# EAGLE board LEDproto (EAGLE 6.6.0), part 1 of 2
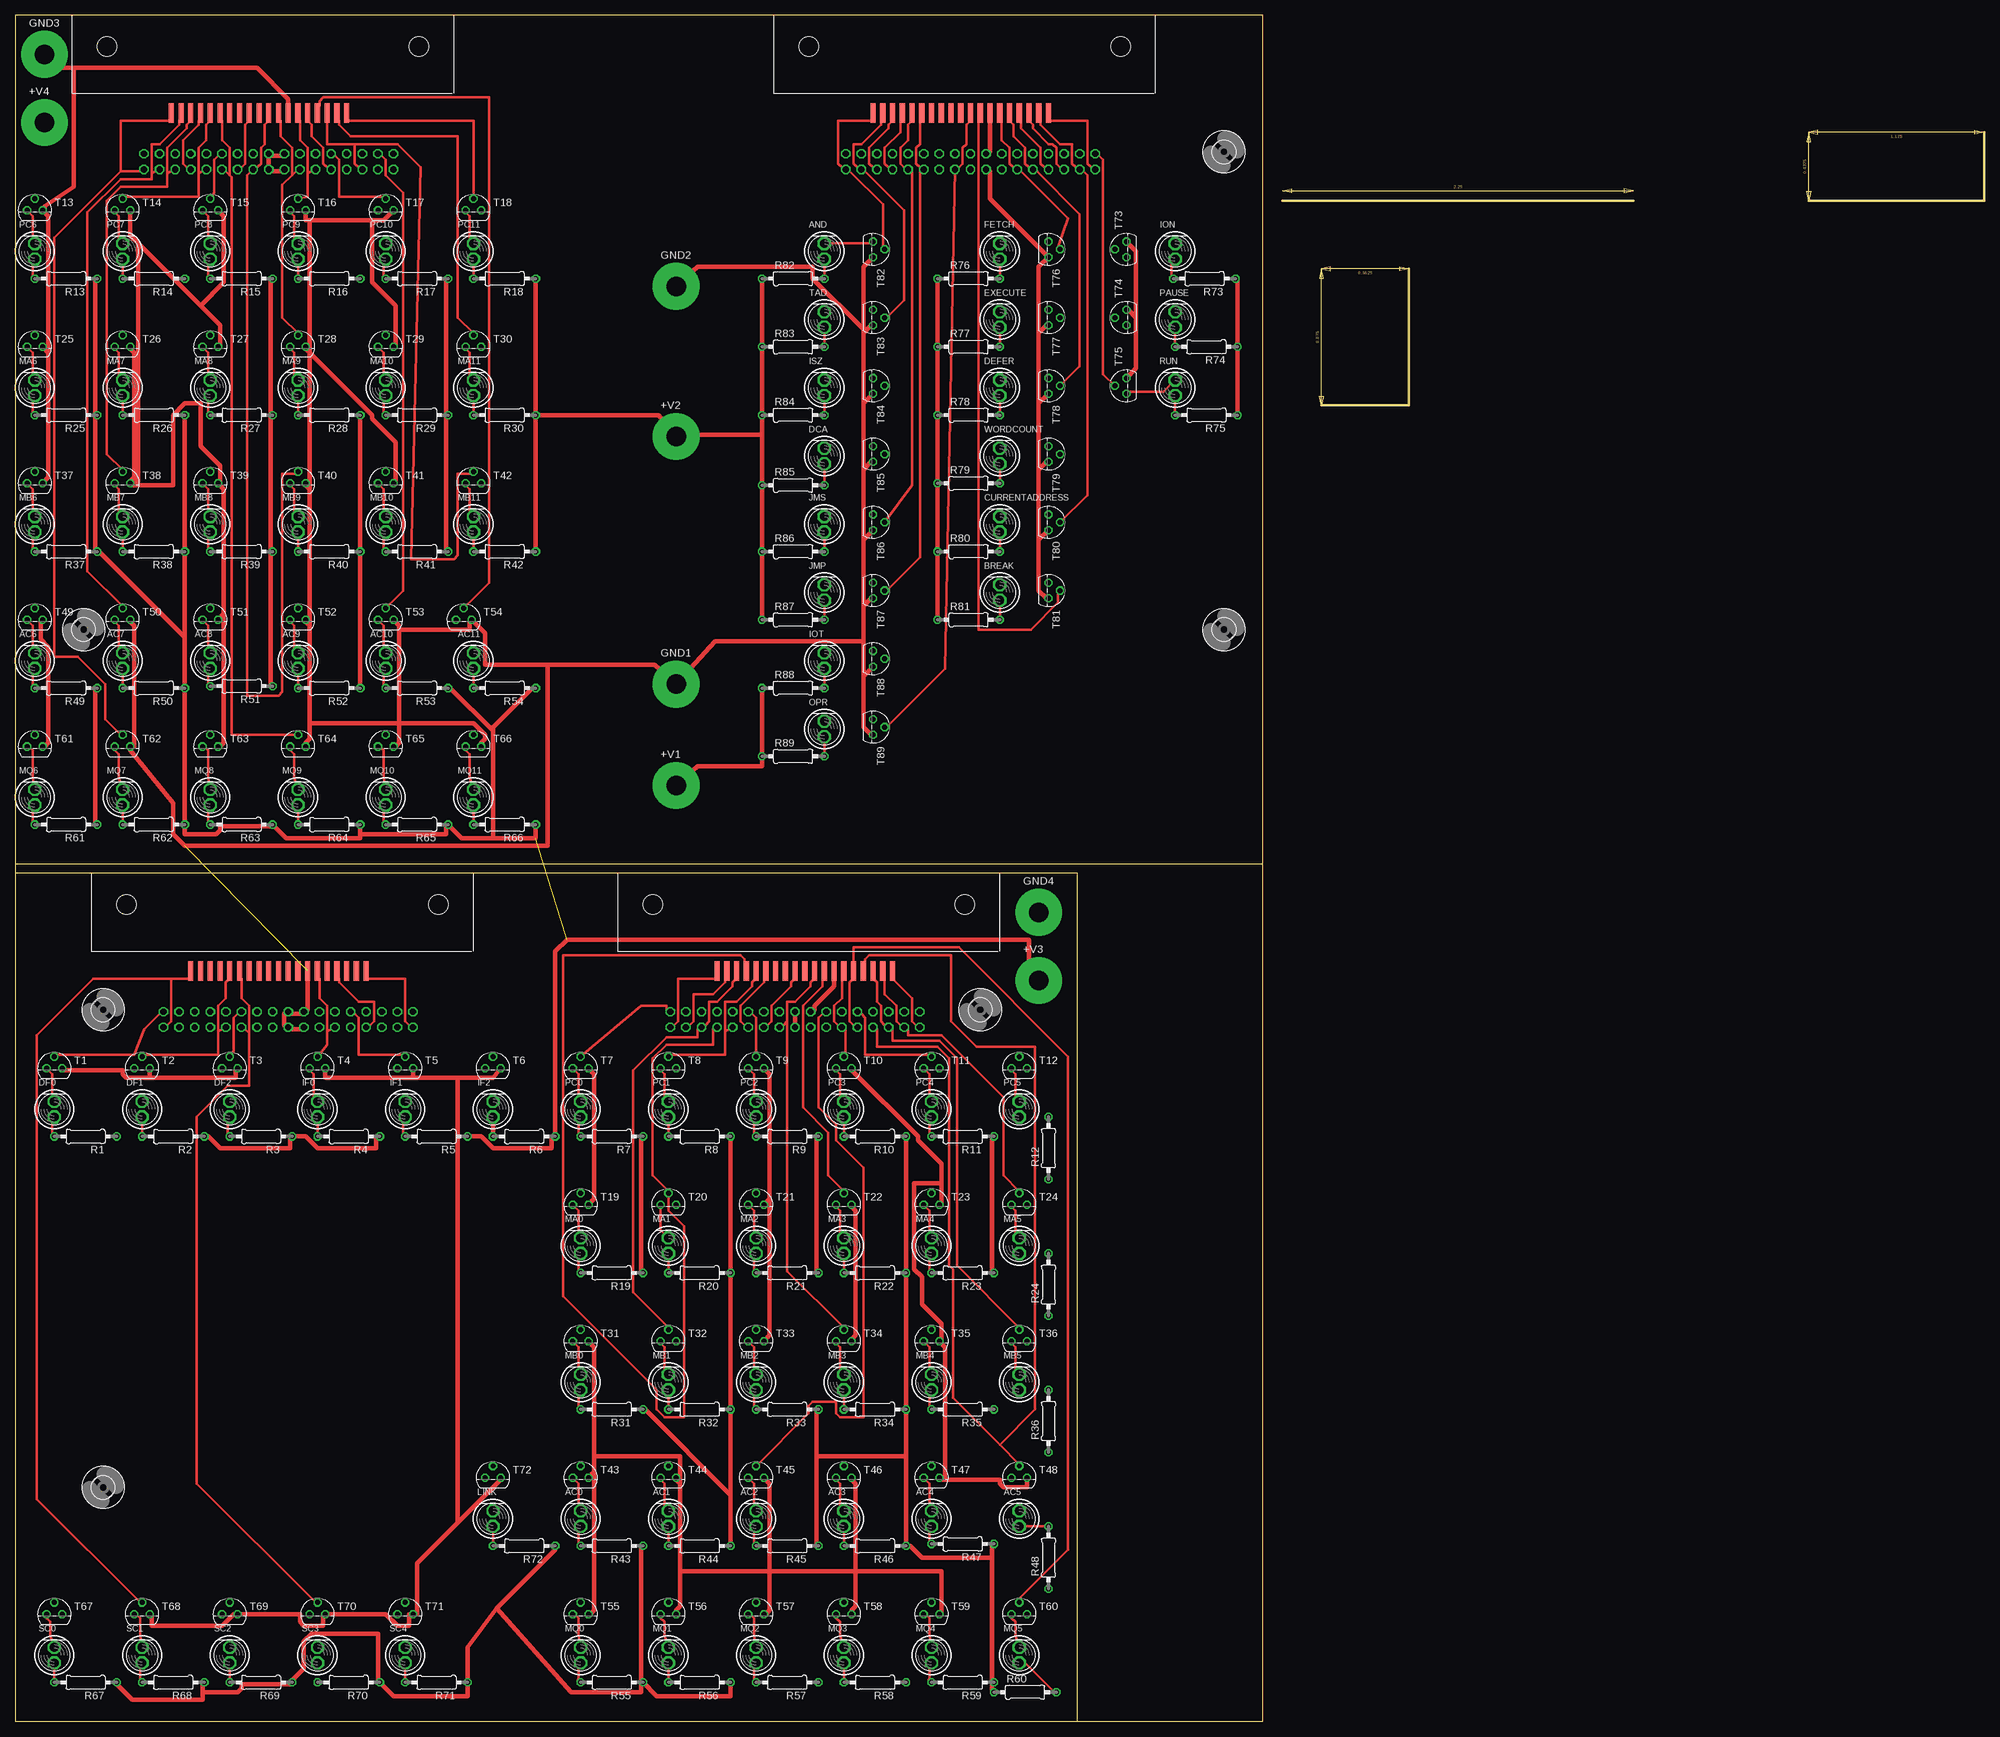
[diagram p0: board, top side]
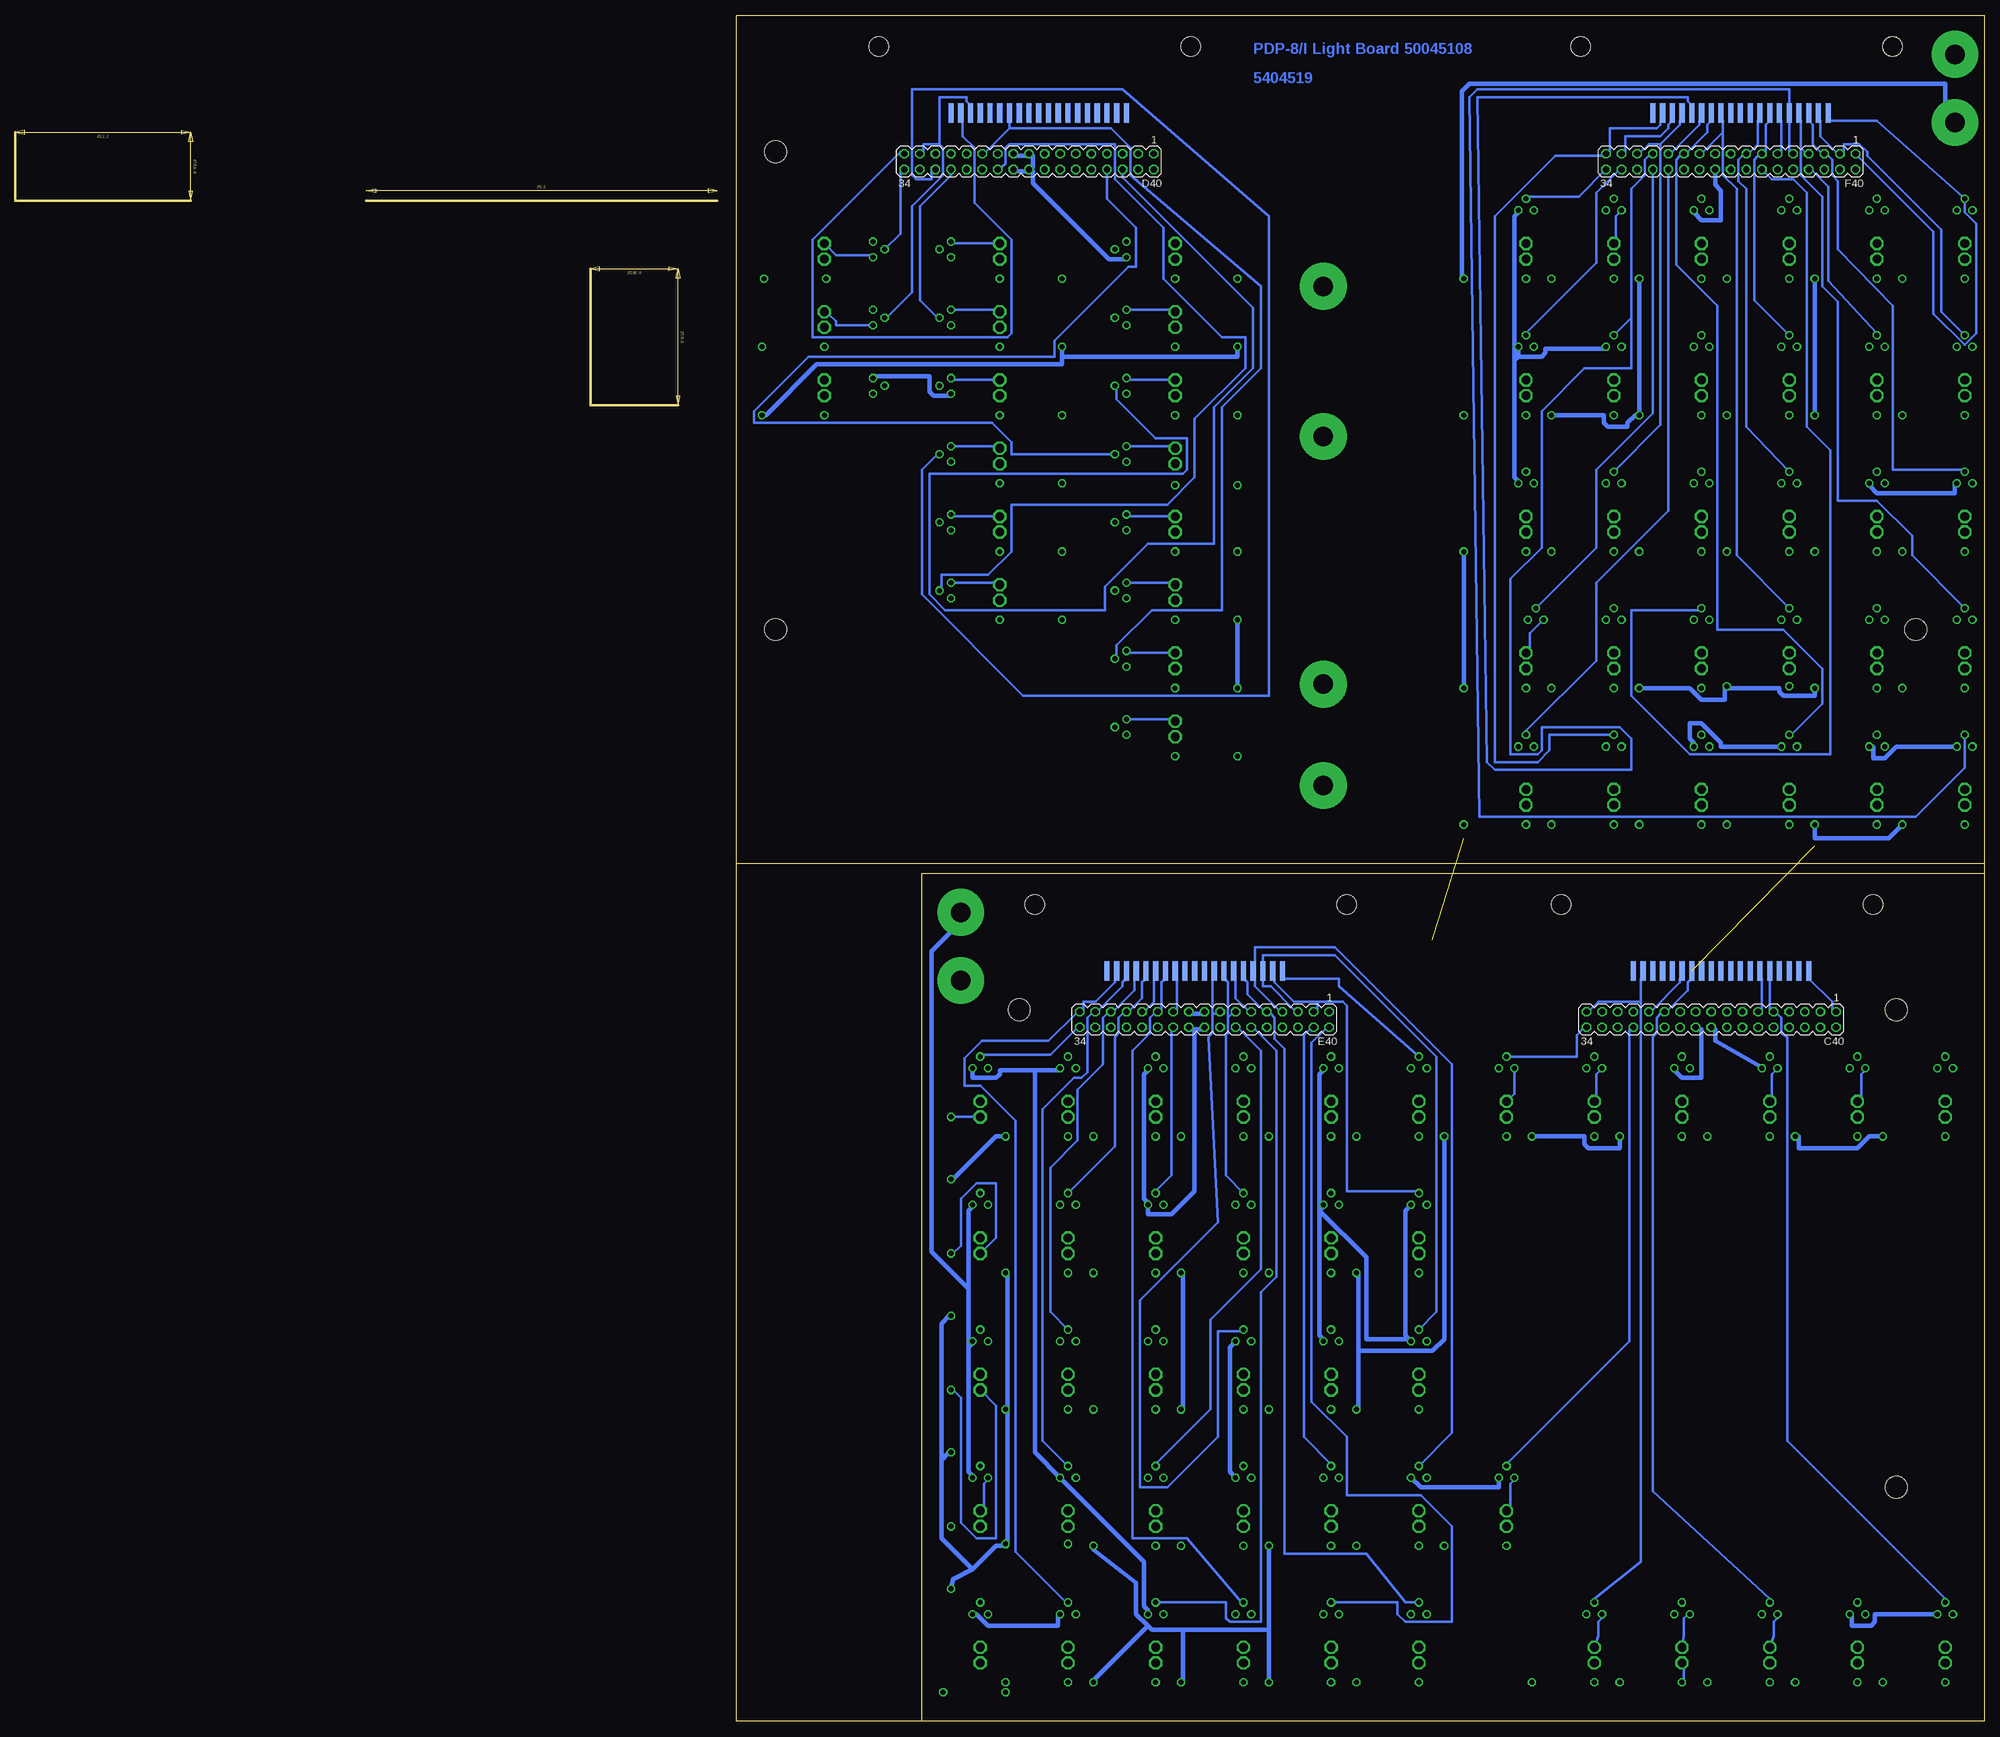
[diagram p1: board, bottom side, seen from below]

Size 320.68 x 277.81 mm. Coordinates in mm from the lower left corner, seen from the top.
Outline: 203.2,139.7 203.2,277.81 0,277.81 0,139.7
Outline: 0,138.11 173.04,138.11 173.04,0
Outline: 0,138.11 0,0 173.04,0
Outline: 0,139.7 203.2,139.7
Outline: 173.04,0 203.2,0 203.2,139.7
Outline: 0,139.7 0,138.11
Outline: 292.1,247.65 320.68,247.65 320.68,258.76
Outline: 206.38,247.65 263.52,247.65
Outline: 212.72,214.31 227.01,214.31 227.01,236.54
Copper layers (1*16): Top 0.035mm / dielectric 1.5mm / Bottom 0.035mm
Design rules "15mils": minimum track width 15mil, minimum drill 24mil, track to track 15mil, track to pad 10mil, pad to pad 10mil, via to via 10mil, smd to smd 10mil, copper to edge 25mil, drill to drill 10mil, minimum pad ring 10mil, minimum via ring 8mil, stop-mask expansion 0mil, vias tented up to drill 0mil, thermal gap 10mil
Net classes: 1 supply: width 0.762 mm

## Footprints (pad centres in the part's own frame; a part is rotated, then mirrored left to right if it is on the bottom)
SPADELUG = drill 3.175 pad 7.62: 1 0,0
BULB = drill 1.422 octagon: A 0,0; B 0,2.54
MA17-2 = drill 1.016 octagon: 1 -20.32,-1.27; 2 -20.32,1.27; 3 -17.78,-1.27; 4 -17.78,1.27; 5 -15.24,-1.27; 6 -15.24,1.27; 7 -12.7,-1.27; 8 -12.7,1.27; 9 -10.16,-1.27; 10 -10.16,1.27; 11 -7.62,-1.27; 12 -7.62,1.27; 13 -5.08,-1.27; 14 -5.08,1.27; 15 -2.54,-1.27; 16 -2.54,1.27; 17 0,-1.27; 18 0,1.27; 19 2.54,-1.27; 20 2.54,1.27; 21 5.08,-1.27; 22 5.08,1.27; 23 7.62,-1.27; 24 7.62,1.27; 25 10.16,-1.27; 26 10.16,1.27; 27 12.7,-1.27; 28 12.7,1.27; 29 15.24,-1.27; 30 15.24,1.27; 31 17.78,-1.27; 32 17.78,1.27; 33 20.32,-1.27; 34 20.32,1.27
FLEX19 = smd 3.175 x 0.838: 1 0,14.287; 2 0,12.7; 3 0,11.113; 4 0,9.525; 5 0,7.938; 6 0,6.35; 7 0,4.763; 8 0,3.175; 9 0,1.587; 10 0,0; 11 0,-1.587; 12 0,-3.175; 13 0,-4.763; 14 0,-6.35; 15 0,-7.938; 16 0,-9.525; 17 0,-11.113; 18 0,-12.7; 19 0,-14.287
0207/10 = drill 0.813 octagon: 1 -5.08,0; 2 5.08,0
TO92 = drill 0.813 octagon: 1 1.27,0; 2 0,1.905; 3 -1.27,0
STRAIN-RELIEF = hole 3.175: 7.62,56.515; 7.62,5.715
3,6 = hole 3.6: 0,0

## Placement (x,y rotation side)
+V1  LUG  [SPADELUG]  107.63,152.4 0 top
+V2  LUG  [SPADELUG]  107.63,209.23 0 top
+V3  LUG  [SPADELUG]  166.69,120.65 0 top
+V4  LUG  [SPADELUG]  4.76,260.35 0 top
AC0  [BULB]  92.08,31.75 0 top
AC1  [BULB]  106.36,31.75 0 top
AC2  [BULB]  120.65,31.75 0 top
AC3  [BULB]  134.94,31.75 0 top
AC4  [BULB]  149.22,31.75 0 top
AC5  [BULB]  163.51,31.75 0 top
AC6  [BULB]  3.17,171.45 0 top
AC7  [BULB]  17.46,171.45 0 top
AC8  [BULB]  31.75,171.45 0 top
AC9  [BULB]  46.04,171.45 0 top
AC10  [BULB]  60.33,171.45 0 top
AC11  [BULB]  74.61,171.45 0 top
AND  [BULB]  131.76,238.12 0 top
BREAK  [BULB]  160.34,182.56 0 top
C40  [MA17-2]  44.45,114.3 180 bottom
C40BOT  FLEX19  [FLEX19]  42.86,122.24 90 top
C40TOP  FLEX19  [FLEX19]  42.86,122.24 270 bottom
CURRENTADDRESS  [BULB]  160.34,193.68 0 top
D40  [MA17-2]  155.57,254 180 bottom
D40BOT  FLEX19  [FLEX19]  128.59,122.24 90 top
D40TOP  FLEX19  [FLEX19]  128.59,122.24 270 bottom
DCA  [BULB]  131.76,204.79 0 top
DEFER  [BULB]  160.34,215.9 0 top
DF0  [BULB]  6.35,98.42 0 top
DF1  [BULB]  20.64,98.42 0 top
DF2  [BULB]  34.92,98.42 0 top
E40  [MA17-2]  127,114.3 180 bottom
E40BOT  FLEX19  [FLEX19]  39.69,261.94 90 top
E40TOP  FLEX19  [FLEX19]  39.69,261.94 270 bottom
EXECUTE  [BULB]  160.34,227.01 0 top
F40  [MA17-2]  41.27,254 180 bottom
F40BOT  FLEX19  [FLEX19]  153.99,261.94 90 top
F40TOP  FLEX19  [FLEX19]  153.99,261.94 270 bottom
FETCH  [BULB]  160.34,238.12 0 top
GND1  LUG  [SPADELUG]  107.63,168.91 0 top
GND2  LUG  [SPADELUG]  107.63,233.68 0 top
GND3  LUG  [SPADELUG]  4.76,271.46 0 top
GND4  LUG  [SPADELUG]  166.69,131.76 0 top
IF0  [BULB]  49.21,98.42 0 top
IF1  [BULB]  63.5,98.42 0 top
IF2  [BULB]  77.79,98.42 0 top
ION  [BULB]  188.91,238.12 0 top
IOT  [BULB]  131.76,171.45 0 top
ISZ  [BULB]  131.76,215.9 0 top
JMP  [BULB]  131.76,182.56 0 top
JMS  [BULB]  131.76,193.68 0 top
LINK  [BULB]  77.79,31.75 0 top
MA0  [BULB]  92.08,76.2 0 top
MA1  [BULB]  106.36,76.2 0 top
MA2  [BULB]  120.65,76.2 0 top
MA3  [BULB]  134.94,76.2 0 top
MA4  [BULB]  149.22,76.2 0 top
MA5  [BULB]  163.51,76.2 0 top
MA6  [BULB]  3.17,215.9 0 top
MA7  [BULB]  17.46,215.9 0 top
MA8  [BULB]  31.75,215.9 0 top
MA9  [BULB]  46.04,215.9 0 top
MA10  [BULB]  60.33,215.9 0 top
MA11  [BULB]  74.61,215.9 0 top
MB0  [BULB]  92.08,53.98 0 top
MB1  [BULB]  106.36,53.98 0 top
MB2  [BULB]  120.65,53.98 0 top
MB3  [BULB]  134.94,53.98 0 top
MB4  [BULB]  149.22,53.98 0 top
MB5  [BULB]  163.51,53.98 0 top
MB6  [BULB]  3.17,193.68 0 top
MB7  [BULB]  17.46,193.68 0 top
MB8  [BULB]  31.75,193.68 0 top
MB9  [BULB]  46.04,193.68 0 top
MB10  [BULB]  60.33,193.68 0 top
MB11  [BULB]  74.61,193.68 0 top
MQ0  [BULB]  92.08,9.53 0 top
MQ1  [BULB]  106.36,9.53 0 top
MQ2  [BULB]  120.65,9.53 0 top
MQ3  [BULB]  134.94,9.53 0 top
MQ4  [BULB]  149.22,9.53 0 top
MQ5  [BULB]  163.51,9.53 0 top
MQ6  [BULB]  3.17,149.22 0 top
MQ7  [BULB]  17.46,149.22 0 top
MQ8  [BULB]  31.75,149.22 0 top
MQ9  [BULB]  46.04,149.22 0 top
MQ10  [BULB]  60.33,149.22 0 top
MQ11  [BULB]  74.61,149.22 0 top
OPR  [BULB]  131.76,160.34 0 top
PAUSE  [BULB]  188.91,227.01 0 top
PC0  [BULB]  92.08,98.42 0 top
PC1  [BULB]  106.36,98.42 0 top
PC2  [BULB]  120.65,98.42 0 top
PC3  [BULB]  134.94,98.42 0 top
PC4  [BULB]  149.22,98.42 0 top
PC5  [BULB]  163.51,98.42 0 top
PC6  [BULB]  3.17,238.12 0 top
PC7  [BULB]  17.46,238.12 0 top
PC8  [BULB]  31.75,238.12 0 top
PC9  [BULB]  46.04,238.12 0 top
PC10  [BULB]  60.33,238.12 0 top
PC11  [BULB]  74.61,238.12 0 top
R1  1.5K  [0207/10]  11.43,95.25 180 top
R2  1.5K  [0207/10]  25.72,95.25 180 top
R3  1.5K  [0207/10]  40.01,95.25 180 top
R4  1.5K  [0207/10]  54.29,95.25 180 top
R5  1.5K  [0207/10]  68.58,95.25 180 top
R6  1.5K  [0207/10]  82.87,95.25 180 top
R7  1.5K  [0207/10]  97.16,95.25 180 top
R8  1.5K  [0207/10]  111.44,95.25 180 top
R9  1.5K  [0207/10]  125.73,95.25 180 top
R10  1.5K  [0207/10]  140.02,95.25 180 top
R11  1.5K  [0207/10]  154.31,95.25 180 top
R12  1.5K  [0207/10]  168.28,93.34 90 top
R13  1.5K  [0207/10]  8.26,234.95 180 top
R14  1.5K  [0207/10]  22.54,234.95 180 top
R15  1.5K  [0207/10]  36.83,234.95 180 top
R16  1.5K  [0207/10]  51.12,234.95 180 top
R17  1.5K  [0207/10]  65.41,234.95 180 top
R18  1.5K  [0207/10]  79.69,234.95 180 top
R19  1.5K  [0207/10]  97.16,73.03 180 top
R20  1.5K  [0207/10]  111.44,73.03 180 top
R21  1.5K  [0207/10]  125.73,73.03 180 top
R22  1.5K  [0207/10]  140.02,73.03 180 top
R23  1.5K  [0207/10]  154.31,73.03 180 top
R24  1.5K  [0207/10]  168.28,71.12 90 top
R25  1.5K  [0207/10]  8.26,212.72 180 top
R26  1.5K  [0207/10]  22.54,212.72 180 top
R27  1.5K  [0207/10]  36.83,212.72 180 top
R28  1.5K  [0207/10]  51.12,212.72 180 top
R29  1.5K  [0207/10]  65.41,212.72 180 top
R30  1.5K  [0207/10]  79.69,212.72 180 top
R31  1.5K  [0207/10]  97.16,50.8 180 top
R32  1.5K  [0207/10]  111.44,50.8 180 top
R33  1.5K  [0207/10]  125.73,50.8 180 top
R34  1.5K  [0207/10]  140.02,50.8 180 top
R35  1.5K  [0207/10]  154.31,50.8 180 top
R36  1.5K  [0207/10]  168.28,48.9 90 top
R37  1.5K  [0207/10]  8.26,190.5 180 top
R38  1.5K  [0207/10]  22.54,190.5 180 top
R39  1.5K  [0207/10]  36.83,190.5 180 top
R40  1.5K  [0207/10]  51.12,190.5 180 top
R41  1.5K  [0207/10]  65.41,190.5 180 top
R42  1.5K  [0207/10]  79.69,190.5 180 top
R43  1.5K  [0207/10]  97.16,28.57 180 top
R44  1.5K  [0207/10]  111.44,28.57 180 top
R45  1.5K  [0207/10]  125.73,28.57 180 top
R46  1.5K  [0207/10]  140.02,28.57 180 top
R47  1.5K  [0207/10]  154.31,28.89 180 top
R48  1.5K  [0207/10]  168.28,26.67 90 top
R49  1.5K  [0207/10]  8.26,168.28 180 top
R50  1.5K  [0207/10]  22.54,168.28 180 top
R51  1.5K  [0207/10]  36.83,168.59 180 top
R52  1.5K  [0207/10]  51.12,168.28 180 top
R53  1.5K  [0207/10]  65.41,168.28 180 top
R54  1.5K  [0207/10]  79.69,168.28 180 top
R55  1.5K  [0207/10]  97.16,6.35 180 top
R56  1.5K  [0207/10]  111.44,6.35 180 top
R57  1.5K  [0207/10]  125.73,6.35 180 top
R58  1.5K  [0207/10]  140.02,6.35 180 top
R59  1.5K  [0207/10]  154.31,6.35 180 top
R60  1.5K  [0207/10]  164.47,4.76 0 top
R61  1.5K  [0207/10]  8.26,146.05 180 top
R62  1.5K  [0207/10]  22.54,146.05 180 top
R63  1.5K  [0207/10]  36.83,146.05 180 top
R64  1.5K  [0207/10]  51.12,146.05 180 top
R65  1.5K  [0207/10]  65.41,146.05 180 top
R66  1.5K  [0207/10]  79.69,146.05 180 top
R67  1.5K  [0207/10]  11.43,6.35 180 top
R68  1.5K  [0207/10]  25.72,6.35 180 top
R69  1.5K  [0207/10]  40.01,6.35 180 top
R70  1.5K  [0207/10]  54.29,6.35 180 top
R71  1.5K  [0207/10]  68.58,6.35 180 top
R72  1.5K  [0207/10]  82.87,28.57 180 top
R73  1.5K  [0207/10]  193.68,234.95 180 top
R74  1.5K  [0207/10]  193.99,223.84 180 top
R75  1.5K  [0207/10]  193.99,212.72 180 top
R76  1.5K  [0207/10]  155.26,234.95 0 top
R77  1.5K  [0207/10]  155.26,223.84 0 top
R78  1.5K  [0207/10]  155.26,212.72 0 top
R79  1.5K  [0207/10]  155.26,201.61 0 top
R80  1.5K  [0207/10]  155.26,190.5 0 top
R81  1.5K  [0207/10]  155.26,179.39 0 top
R82  1.5K  [0207/10]  126.68,234.95 0 top
R83  1.5K  [0207/10]  126.68,223.84 0 top
R84  1.5K  [0207/10]  126.68,212.72 0 top
R85  1.5K  [0207/10]  126.68,201.29 0 top
R86  1.5K  [0207/10]  126.68,190.5 0 top
R87  1.5K  [0207/10]  126.68,179.39 0 top
R88  1.5K  [0207/10]  126.68,168.28 0 top
R89  1.5K  [0207/10]  126.68,157.16 0 top
RUN  [BULB]  188.91,215.9 0 top
SC0  [BULB]  6.35,9.53 0 top
SC1  [BULB]  20.64,9.53 0 top
SC2  [BULB]  34.92,9.53 0 top
SC3  [BULB]  49.21,9.53 0 top
SC4  [BULB]  63.5,9.53 0 top
T1  2N2222  [TO92]  6.35,106.36 0 top
T2  2N2222  [TO92]  20.64,106.36 0 top
T3  2N2222  [TO92]  34.92,106.36 0 top
T4  2N2222  [TO92]  49.21,106.36 0 top
T5  2N2222  [TO92]  63.5,106.36 0 top
T6  2N2222  [TO92]  77.79,106.36 0 top
T7  2N2222  [TO92]  92.08,106.36 0 top
T8  2N2222  [TO92]  106.36,106.36 0 top
T9  2N2222  [TO92]  120.65,106.36 0 top
T10  2N2222  [TO92]  134.94,106.36 0 top
T11  2N2222  [TO92]  149.22,106.36 0 top
T12  2N2222  [TO92]  163.51,106.36 0 top
T13  2N2222  [TO92]  3.17,246.06 0 top
T14  2N2222  [TO92]  17.46,246.06 0 top
T15  2N2222  [TO92]  31.75,246.06 0 top
T16  2N2222  [TO92]  46.04,246.06 0 top
T17  2N2222  [TO92]  60.33,246.06 0 top
T18  2N2222  [TO92]  74.61,246.06 0 top
T19  2N2222  [TO92]  92.08,84.14 0 top
T20  2N2222  [TO92]  106.36,84.14 0 top
T21  2N2222  [TO92]  120.65,84.14 0 top
T22  2N2222  [TO92]  134.94,84.14 0 top
T23  2N2222  [TO92]  149.22,84.14 0 top
T24  2N2222  [TO92]  163.51,84.14 0 top
T25  2N2222  [TO92]  3.17,223.84 0 top
T26  2N2222  [TO92]  17.46,223.84 0 top
T27  2N2222  [TO92]  31.75,223.84 0 top
T28  2N2222  [TO92]  46.04,223.84 0 top
T29  2N2222  [TO92]  60.33,223.84 0 top
T30  2N2222  [TO92]  74.61,223.84 0 top
T31  2N2222  [TO92]  92.08,61.91 0 top
T32  2N2222  [TO92]  106.36,61.91 0 top
T33  2N2222  [TO92]  120.65,61.91 0 top
T34  2N2222  [TO92]  134.94,61.91 0 top
T35  2N2222  [TO92]  149.22,61.91 0 top
T36  2N2222  [TO92]  163.51,61.91 0 top
T37  2N2222  [TO92]  3.17,201.61 0 top
T38  2N2222  [TO92]  17.46,201.61 0 top
T39  2N2222  [TO92]  31.75,201.61 0 top
T40  2N2222  [TO92]  46.04,201.61 0 top
T41  2N2222  [TO92]  60.33,201.61 0 top
T42  2N2222  [TO92]  74.61,201.61 0 top
T43  2N2222  [TO92]  92.08,39.69 0 top
T44  2N2222  [TO92]  106.36,39.69 0 top
T45  2N2222  [TO92]  120.65,39.69 0 top
T46  2N2222  [TO92]  134.94,39.69 0 top
T47  2N2222  [TO92]  149.22,39.69 0 top
T48  2N2222  [TO92]  163.51,39.69 0 top
T49  2N2222  [TO92]  3.17,179.39 0 top
T50  2N2222  [TO92]  17.46,179.39 0 top
T51  2N2222  [TO92]  31.75,179.39 0 top
T52  2N2222  [TO92]  46.04,179.39 0 top
T53  2N2222  [TO92]  60.33,179.39 0 top
T54  2N2222  [TO92]  73.03,179.39 0 top
T55  2N2222  [TO92]  92.08,17.46 0 top
T56  2N2222  [TO92]  106.36,17.46 0 top
T57  2N2222  [TO92]  120.65,17.46 0 top
T58  2N2222  [TO92]  134.94,17.46 0 top
T59  2N2222  [TO92]  149.22,17.46 0 top
T60  2N2222  [TO92]  163.51,17.46 0 top
T61  2N2222  [TO92]  3.17,158.75 0 top
T62  2N2222  [TO92]  17.46,158.75 0 top
T63  2N2222  [TO92]  31.75,158.75 0 top
T64  2N2222  [TO92]  46.04,158.75 0 top
T65  2N2222  [TO92]  60.33,158.75 0 top
T66  2N2222  [TO92]  74.61,158.75 0 top
T67  2N2222  [TO92]  6.35,17.46 0 top
T68  2N2222  [TO92]  20.64,17.46 0 top
T69  2N2222  [TO92]  34.92,17.46 0 top
T70  2N2222  [TO92]  49.21,17.46 0 top
T71  2N2222  [TO92]  63.5,17.46 0 top
T72  2N2222  [TO92]  77.79,39.69 0 top
T73  2N2222  [TO92]  180.97,239.71 90 top
T74  2N2222  [TO92]  180.97,228.6 90 top
T75  2N2222  [TO92]  180.97,217.49 90 top
T76  2N2222  [TO92]  168.28,239.71 270 top
T77  2N2222  [TO92]  168.28,228.6 270 top
T78  2N2222  [TO92]  168.28,217.49 270 top
T79  2N2222  [TO92]  168.28,206.38 270 top
T80  2N2222  [TO92]  168.28,195.26 270 top
T81  2N2222  [TO92]  168.28,184.15 270 top
T82  2N2222  [TO92]  139.7,239.71 270 top
T83  2N2222  [TO92]  139.7,228.6 270 top
T84  2N2222  [TO92]  139.7,217.49 270 top
T85  2N2222  [TO92]  139.7,206.38 270 top
T86  2N2222  [TO92]  139.7,195.26 270 top
T87  2N2222  [TO92]  139.7,184.15 270 top
T88  2N2222  [TO92]  139.7,173.04 270 top
T89  2N2222  [TO92]  139.7,161.93 270 top
TAD  [BULB]  131.76,227.01 0 top
U$1  [STRAIN-RELIEF]  74.61,125.41 90 top
U$2  [STRAIN-RELIEF]  160.34,125.41 90 top
U$3  [STRAIN-RELIEF]  71.44,265.11 90 top
U$4  [STRAIN-RELIEF]  185.74,265.11 90 top
U$5  [3,6]  196.85,255.59 0 top
U$6  [3,6]  196.85,177.8 0 top
U$7  [3,6]  11.11,177.8 0 top
U$8  [3,6]  14.29,38.1 0 top
U$9  [3,6]  14.29,115.89 0 top
U$11  [3,6]  157.16,115.89 0 top
WORDCOUNT  [BULB]  160.34,204.79 0 top

## Library data of the parts
+V1-+V4 AC0 AC1-AC11 AND BREAK C40BOT C40TOP CURRENTADDRESS D40BOT D40TOP DCA DEFER DF0 DF1 DF2 E40BOT E40TOP EXECUTE F40BOT F40TOP FETCH GND1-GND4 IF0 IF1 IF2 ION IOT ISZ JMP JMS LINK MA0 MA1-MA11 MB0 MB1-MB11 MQ0 MQ1-MQ11 OPR PAUSE PC0 PC1-PC11 RUN SC0 SC1-SC4 TAD U$1-U$4 WORDCOUNT = dec-con
C40 D40 E40 F40 = con-lstb; OC_FARNELL: unknown; OC_NEWARK: unknown
R1-R89 = rcl
T1-T89 = transistor
U$5-U$9 U$11 = holes

## Nets
+15V [supply]: +V1.1 +V2.1 +V3.1 +V4.1 R1.1 R2.1 R3.1 R4.1 R5.1 R6.1 R7.1 R8.1 R9.1 R10.1 R11.1 R12.1 R13.1 R14.1 R15.1 R16.1 R17.1 R18.1 R19.1 R20.1 R21.1 R22.1 R23.1 R24.1 R25.1 R26.1 R27.1 R28.1 R29.1 R30.1 R31.1 R32.1 R33.1 R34.1 R35.1 R36.1 R37.1 R38.1 R39.1 R40.1 R41.1 R42.1 R43.1 R44.1 R45.1 R46.1 R47.1 R48.1 R49.1 R50.1 R51.1 R52.1 R53.1 R54.1 R55.1 R56.1 R57.1 R58.1 R59.1 R60.1 R61.1 R62.1 R63.1 R64.1 R65.1 R66.1 R67.1 R68.1 R69.1 R70.1 R71.1 R72.1 R73.1 R74.1 R75.1 R76.1 R77.1 R78.1 R79.1 R80.1 R81.1 R82.1 R83.1 R84.1 R85.1 R86.1 R87.1 R88.1 R89.1
AC0: D40TOP.4 E40.7 T43.2
AC1: D40BOT.2 E40.4 T44.2
AC2: D40TOP.12 E40.21 T45.2
AC3: D40BOT.9 E40.14 T46.2
AC4: D40TOP.17 E40.31 T47.2
AC5: D40BOT.16 E40.28 T48.2
AC6: E40TOP.4 F40.7 T49.2
AC7: E40BOT.2 F40.4 T50.2
AC8: E40TOP.12 F40.21 T51.2
AC9: E40BOT.9 F40.14 T52.2
AC10: E40TOP.17 F40.31 T53.2
AC11: E40BOT.16 F40.28 T54.2
AND: D40.2 F40BOT.1 T82.2
BREAK: D40.22 F40BOT.12 T81.2
CA: D40.32 F40BOT.18 T80.2
DCA: D40.8 F40BOT.4 T85.2
DEFER: D40.26 F40BOT.15 T78.2
DF0: C40.1 C40TOP.1 T1.2
DF1: C40.10 C40BOT.5 T2.2
DF2: C40.11 C40TOP.6 T3.2
EXECUTE: D40.28 F40BOT.16 T77.2
FETCH: D40.24 F40BOT.14 T76.2
GND [supply]: C40.17 C40.18 C40.19 C40.20 C40BOT.13 D40.17 D40.18 D40.19 D40.20 D40BOT.13 E40.17 E40.18 E40.19 E40.20 E40BOT.13 F40.17 F40.18 F40.19 F40.20 F40BOT.13 GND1.1 GND2.1 GND3.1 GND4.1 T1.1 T2.1 T3.1 T4.1 T5.1 T6.1 T7.1 T8.1 T9.1 T10.1 T11.1 T12.1 T13.1 T14.1 T15.1 T16.1 T17.1 T18.1 T19.1 T20.1 T21.1 T22.1 T23.1 T24.1 T25.1 T26.1 T27.1 T28.1 T29.1 T30.1 T31.1 T32.1 T33.1 T34.1 T35.1 T36.1 T37.1 T38.1 T39.1 T40.1 T41.1 T42.1 T43.1 T44.1 T45.1 T46.1 T47.1 T48.1 T49.1 T50.1 T51.1 T52.1 T53.1 T54.1 T55.1 T56.1 T57.1 T58.1 T59.1 T60.1 T61.1 T62.1 T63.1 T64.1 T65.1 T66.1 T67.1 T68.1 T69.1 T70.1 T71.1 T72.1 T73.1 T74.1 T75.1 T76.1 T77.1 T78.1 T79.1 T80.1 T81.1 T82.1 T83.1 T84.1 T85.1 T86.1 T87.1 T88.1 T89.1
IF0: C40.24 C40BOT.14 T4.2
IF1: C40.25 C40TOP.14 T5.2
IF2: C40.34 C40BOT.19 T6.2
ION: D40.34 F40BOT.19 T73.2
IOT: D40.23 F40TOP.13 T88.2
ISZ: D40.6 F40BOT.3 T84.2
JMP: D40.12 F40BOT.6 T87.2
JMS: D40.10 F40BOT.5 T86.2
LINK: C40.28 C40BOT.16 T72.2
MA0: D40TOP.2 E40.3 T19.2
MA1: D40BOT.4 E40.8 T20.2
MA2: D40TOP.7 E40.13 T21.2
MA3: D40BOT.12 E40.22 T22.2
MA4: D40TOP.15 E40.27 T23.2
MA5: D40BOT.18 E40.32 T24.2
MA6: E40TOP.2 F40.3 T25.2
MA7: E40BOT.4 F40.8 T26.2
MA8: E40TOP.7 F40.13 T27.2
MA9: E40BOT.12 F40.22 T28.2
MA10: E40TOP.15 F40.27 T29.2
MA11: E40BOT.18 F40.32 T30.2
MB0: D40TOP.3 E40.5 T31.2
MB1: D40BOT.3 E40.6 T32.2
MB2: D40TOP.8 E40.15 T33.2
MB3: D40BOT.11 E40.16 T34.2
MB4: D40TOP.16 E40.29 T35.2
MB5: D40BOT.17 E40.30 T36.2
MB6: E40TOP.3 F40.5 T37.2
MB7: E40BOT.3 F40.6 T38.2
MB8: E40TOP.8 F40.15 T39.2
MB9: E40BOT.11 F40.16 T40.2
MB10: E40TOP.16 F40.29 T41.2
MB11: E40BOT.17 F40.30 T42.2
MQ0: D40TOP.5 E40.9 T55.2
MQ1: D40BOT.1 E40.2 T56.2
MQ2: D40TOP.13 E40.23 T57.2
MQ3: D40BOT.6 E40.12 T58.2
MQ4: D40TOP.18 E40.33 T59.2
MQ5: D40BOT.15 E40.26 T60.2
MQ6: E40TOP.5 F40.9 T61.2
MQ7: E40BOT.1 F40.2 T62.2
MQ8: E40TOP.13 F40.23 T63.2
MQ9: E40BOT.6 F40.12 T64.2
MQ10: E40TOP.18 F40.33 T65.2
MQ11: E40BOT.15 F40.26 T66.2
N$1: DF0.B T1.3
N$2: DF1.B T2.3
N$3: DF2.B T3.3
N$4: IF0.B T4.3
N$5: IF1.B T5.3
N$6: IF2.B T6.3
N$7: PC0.B T7.3
N$8: PC1.B T8.3
N$9: PC2.B T9.3
N$10: PC3.B T10.3
N$11: PC4.B T11.3
N$12: PC5.B T12.3
N$13: PC6.B T13.3
N$14: PC7.B T14.3
N$15: PC8.B T15.3
N$16: PC9.B T16.3
N$17: PC10.B T17.3
N$18: PC11.B T18.3
N$19: MA0.B T19.3
N$20: MA1.B T20.3
N$21: MA2.B T21.3
N$22: MA3.B T22.3
N$23: MA4.B T23.3
N$24: MA5.B T24.3
N$25: MA6.B T25.3
N$26: MA7.B T26.3
N$27: MA8.B T27.3
N$28: MA9.B T28.3
N$29: MA10.B T29.3
N$30: MA11.B T30.3
N$31: MB0.B T31.3
N$32: MB1.B T32.3
N$33: MB2.B T33.3
N$34: MB3.B T34.3
N$35: MB4.B T35.3
N$36: MB5.B T36.3
N$37: MB6.B T37.3
N$38: MB7.B T38.3
N$39: MB8.B T39.3
N$40: MB9.B T40.3
N$41: MB10.B T41.3
N$42: MB11.B T42.3
N$43: AC0.B T43.3
N$44: AC1.B T44.3
N$45: AC2.B T45.3
N$46: AC3.B T46.3
N$47: AC4.B T47.3
N$48: AC5.B T48.3
N$49: AC6.B T49.3
N$50: AC7.B T50.3
N$51: AC8.B T51.3
N$52: AC9.B T52.3
N$53: AC10.B T53.3
N$54: AC11.B T54.3
N$55: MQ0.B T55.3
N$56: MQ1.B T56.3
N$57: MQ2.B T57.3
N$58: MQ3.B T58.3
N$59: MQ4.B T59.3
N$60: MQ5.B T60.3
N$61: MQ6.B T61.3
N$62: MQ7.B T62.3
N$63: MQ8.B T63.3
N$64: MQ9.B T64.3
N$65: MQ10.B T65.3
N$66: MQ11.B T66.3
N$67: SC0.B T67.3
N$68: SC1.B T68.3
N$69: SC2.B T69.3
N$70: SC3.B T70.3
N$71: SC4.B T71.3
N$72: LINK.B T72.3
N$73: ION.B T73.3
N$74: PAUSE.B T74.3
N$75: RUN.B T75.3
N$76: FETCH.B T76.3
N$77: EXECUTE.B T77.3
N$78: DEFER.B T78.3
N$79: T79.3 WORDCOUNT.B
N$80: CURRENTADDRESS.B T80.3
N$81: BREAK.B T81.3
N$82: AND.B T82.3
N$83: T83.3 TAD.B
N$84: ISZ.B T84.3
N$85: DCA.B T85.3
N$86: JMS.B T86.3
N$87: JMP.B T87.3
N$88: IOT.B T88.3
N$89: OPR.B T89.3
N$90: DF0.A R1.2
N$91: DF1.A R2.2
N$92: DF2.A R3.2
N$93: IF0.A R4.2
N$94: IF1.A R5.2
N$95: IF2.A R6.2
N$96: PC0.A R7.2
N$97: PC1.A R8.2
N$98: PC2.A R9.2
N$99: PC3.A R10.2
N$100: PC4.A R11.2
N$101: PC5.A R12.2
N$102: PC6.A R13.2
N$103: PC7.A R14.2
N$104: PC8.A R15.2
N$105: PC9.A R16.2
N$106: PC10.A R17.2
N$107: PC11.A R18.2
N$108: ION.A R73.2
N$109: PAUSE.A R74.2
N$110: R75.2 RUN.A
N$111: MA0.A R19.2
N$112: MA1.A R20.2
N$113: MA2.A R21.2
N$114: MA3.A R22.2
N$115: MA4.A R23.2
N$116: MA5.A R24.2
N$117: MA6.A R25.2
N$118: MA7.A R26.2
N$119: MA8.A R27.2
N$120: MA9.A R28.2
N$121: MA10.A R29.2
N$122: MA11.A R30.2
N$123: FETCH.A R76.2
N$124: EXECUTE.A R77.2
N$125: DEFER.A R78.2
N$126: R79.2 WORDCOUNT.A
N$127: CURRENTADDRESS.A R80.2
N$128: BREAK.A R81.2
N$129: LINK.A R72.2
N$130: MB0.A R31.2
N$131: MB1.A R32.2
N$132: MB2.A R33.2
N$133: MB3.A R34.2
N$134: MB4.A R35.2
N$135: MB5.A R36.2
N$136: MB6.A R37.2
N$137: MB7.A R38.2
N$138: MB8.A R39.2
N$139: MB9.A R40.2
N$140: MB10.A R41.2
N$141: MB11.A R42.2
N$142: AC0.A R43.2
N$143: AC1.A R44.2
N$144: AC2.A R45.2
N$145: AC3.A R46.2
N$146: AC4.A R47.2
N$147: AC5.A R48.2
N$148: AC6.A R49.2
N$149: AC7.A R50.2
N$150: AC8.A R51.2
N$151: AC9.A R52.2
N$152: AC10.A R53.2
N$153: AC11.A R54.2
N$154: R67.2 SC0.A
N$155: R68.2 SC1.A
N$156: R69.2 SC2.A
N$157: R70.2 SC3.A
N$158: R71.2 SC4.A
N$159: MQ11.A R66.2
N$160: MQ10.A R65.2
N$161: MQ9.A R64.2
N$162: MQ8.A R63.2
N$163: MQ7.A R62.2
N$164: MQ6.A R61.2
N$165: MQ5.A R60.2
N$166: MQ4.A R59.2
N$167: MQ3.A R58.2
N$168: MQ2.A R57.2
N$169: MQ1.A R56.2
N$170: MQ0.A R55.2
N$171: AND.A R82.2
N$172: R83.2 TAD.A
N$173: ISZ.A R84.2
N$174: DCA.A R85.2
N$175: JMS.A R86.2
N$176: JMP.A R87.2
N$177: IOT.A R88.2
N$178: OPR.A R89.2
OPR: D40.16 F40BOT.11 T89.2
PAUSE: D40.31 F40TOP.17 T74.2
PC0: D40TOP.1 E40.1 T7.2
PC1: D40BOT.5 E40.10 T8.2
PC2: D40TOP.6 E40.11 T9.2
PC3: D40BOT.14 E40.24 T10.2
PC4: D40TOP.14 E40.25 T11.2
PC5: D40BOT.19 E40.34 T12.2
PC6: E40TOP.1 F40.1 T13.2
PC7: E40BOT.5 F40.10 T14.2
PC8: E40TOP.6 F40.11 T15.2
PC9: E40BOT.14 F40.24 T16.2
PC10: E40TOP.14 F40.25 T17.2
PC11: E40BOT.19 F40.34 T18.2
RUN: D40.33 F40TOP.18 T75.2
SC0: C40.9 C40TOP.5 T67.2
SC1: C40.2 C40BOT.1 T68.2
SC2: C40.23 C40TOP.13 T69.2
SC3: C40.12 C40BOT.6 T70.2
SC4: C40.33 C40TOP.18 T71.2
TAD: D40.4 F40BOT.2 T83.2
WC: D40.30 F40BOT.17 T79.2